# Altium PCB tempmontoring.PcbDoc
Units mil, origin at the board's own origin, x right, y up, seen from the top; angles counter-clockwise.
Board outline 1078 x 632 mil, 2 copper layers (Top Layer, Bottom Layer); 12 components, 9 nets, 44 pads, 0 vias.
Unrouted connection lines stored in the file: 26.
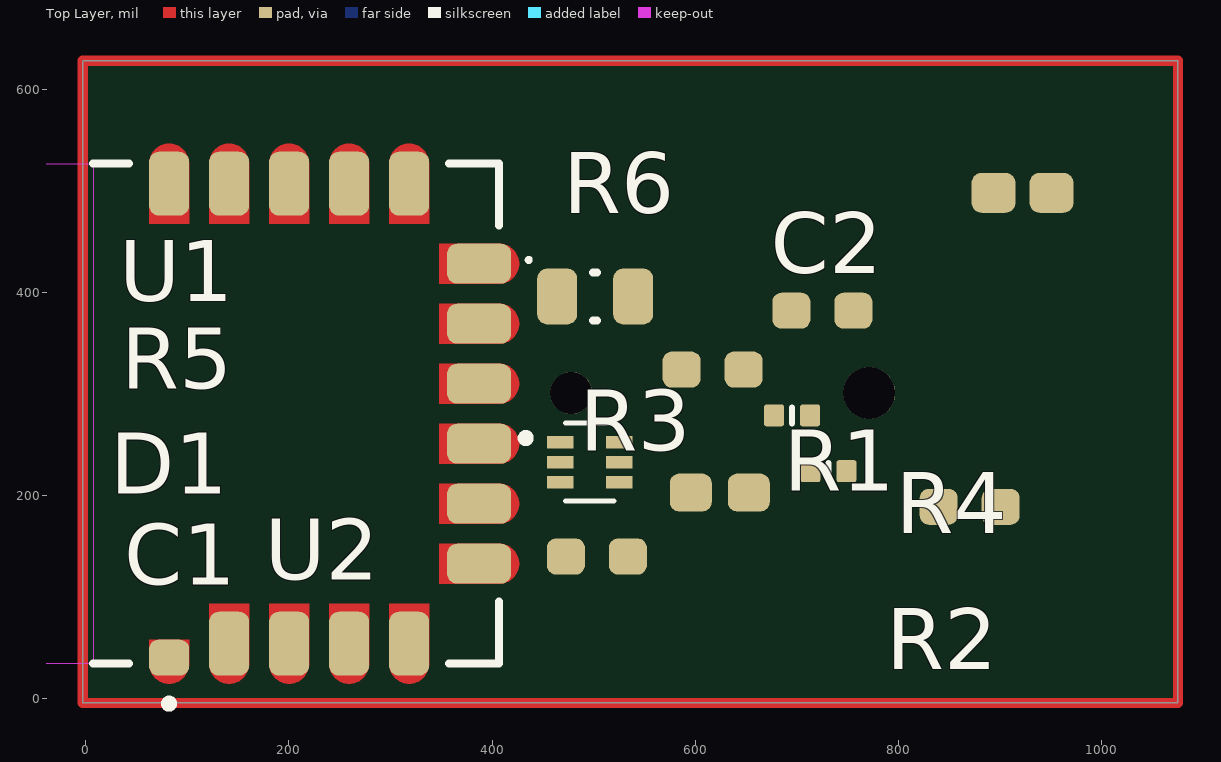
[diagram p0: Top Layer view]
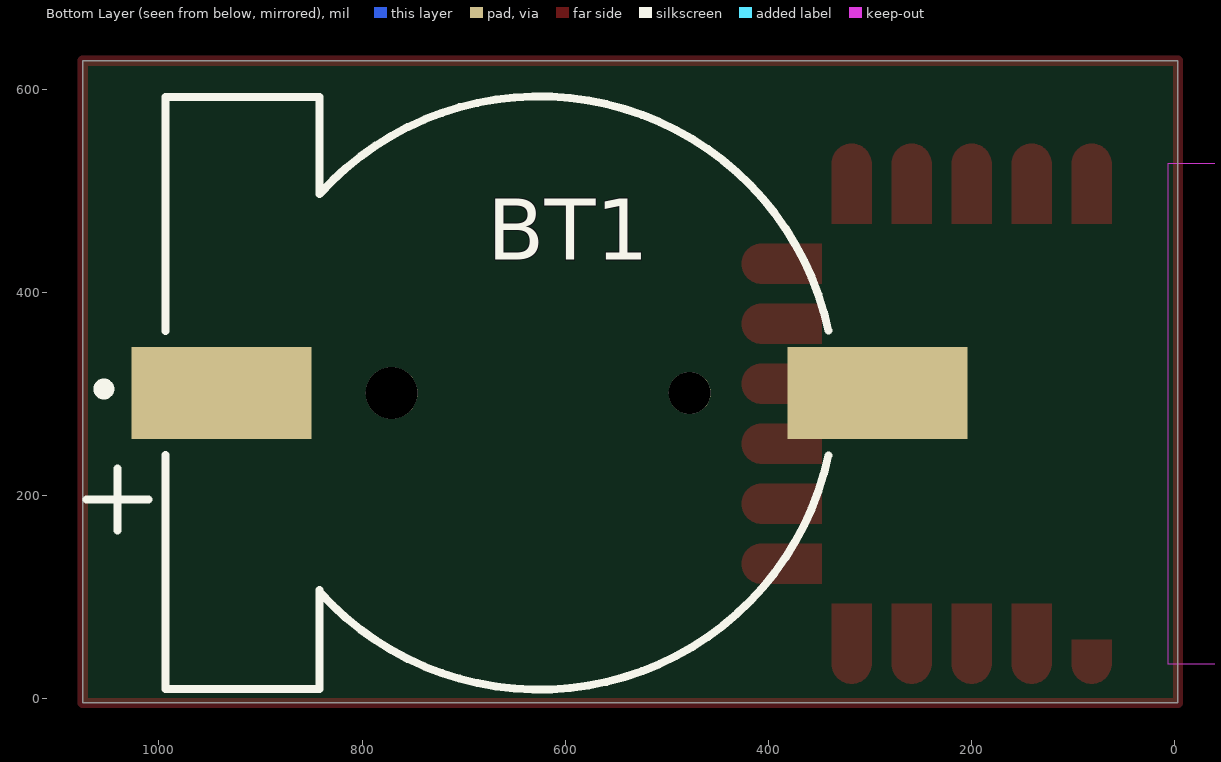
[diagram p1: Bottom Layer view, seen from below]

## Layer stack, top to bottom
Top Solder: solder mask 0.4, Solder Resist, Dk 3.5
Top Layer: signal copper 1.4
Dielectric 1: dielectric 12.6, FR-4, Dk 4.8
Bottom Layer: signal copper 1.4
Bottom Solder: solder mask 0.4, Solder Resist, Dk 3.5

## Board outline
-3,-4 -3,628 1075,628 1075,-4

## Design rules (kind name [scope] priority, off if disabled: settings)
AssemblyTestPointUsage [All] p1: isadvanced=TRUE
AssemblyTestpoint [All] p1: isadvanced=TRUE testpointundercomponent=TRUE minsize=40 maxsize=100 preferedsize=60 minholesize=0 maxholesize=40 preferedholesize=32 testpointgrid=1 usegrid=TRUE gridoriginx=-97 gridoriginy=-1572 gridtolerance=0.01 allowsidetop=TRUE allowsidebottom=TRUE
Clearance Clearance_1 [OnMid vs OnMid] p1: gap=10 ignorepadtopadclearanceinfootprint=FALSE sourcerule=38 cellrowname=All cellrowtype=0 cellcolname=All cellcoltype=0 innerlayers=TRUE
Clearance Clearance_2 [(ExistsOnLayer('Top Layer') Or ExistsOnLayer('Bottom Layer')) vs (ExistsOnLayer('Top Layer') Or ExistsOnLayer('Bottom Layer'))] p2: gap=10 ignorepadtopadclearanceinfootprint=FALSE sourcerule=38 cellrowname=All cellrowtype=0 cellcolname=All cellcoltype=0 outerlayers=TRUE
Clearance [All] p3: gap=10 ignorepadtopadclearanceinfootprint=FALSE ismatrix=TRUE
ComponentClearance [All] p1: isadvanced=TRUE gap=10 collisioncheckmode=3 verticalgap=10 showdistances=FALSE
FabricationTestPointUsage [All] p1: isadvanced=TRUE valid=0 allowmultiple=FALSE
FabricationTestpoint [All] p1: isadvanced=TRUE side=3 testpointundercomponent=TRUE minsize=40 maxsize=100 preferedsize=60 minholesize=0 maxholesize=40 preferedholesize=32 testpointgrid=1 allowsidetop=TRUE allowsidebottom=TRUE usegrid=TRUE gridoriginx=-97 gridoriginy=-1572 gridtolerance=0.01
FanoutControl Fanout_BGA [IsBGA] p1: isadvanced=TRUE bgadir=Out bgaviamode=Centered fanoutstyle=Auto fanoutdirection=Alternating viagrid=1 // Fanout_BGA (Default Rule)
FanoutControl Fanout_LCC [IsLCC] p2: isadvanced=TRUE bgadir=Out bgaviamode=Centered fanoutstyle=Auto fanoutdirection=Alternating viagrid=1 // Fanout_LCC (Default Rule)
FanoutControl Fanout_SOIC [IsSOIC] p3: isadvanced=TRUE bgadir=Out bgaviamode=Centered fanoutstyle=Auto fanoutdirection=Alternating viagrid=1 // Fanout_SOIC (Default Rule)
FanoutControl Fanout_Small [(CompPinCount < 5)] p4: isadvanced=TRUE bgadir=Out bgaviamode=Centered fanoutstyle=Auto fanoutdirection=OutThenIn viagrid=1 // Fanout_Small (Default Rule)
FanoutControl Fanout_Default [All] p5: isadvanced=TRUE bgadir=Out bgaviamode=Centered fanoutstyle=Auto fanoutdirection=Alternating viagrid=1 // Fanout_Default (Default Rule)
Height [All] p1: isadvanced=TRUE minheight=0 maxheight=1000 prefheight=500
HoleSize [All] p1: isadvanced=TRUE absolutevalues=TRUE maxlimit=100 minlimit=1 maxpercent=80.000 minpercent=20.000
HoleToHoleClearance [All] p1: isadvanced=TRUE gap=10 allowstackedmicrovias=TRUE
LayerPairs [All] p1: isadvanced=TRUE enforce=TRUE
MinimumSolderMaskSliver [All] p1: isadvanced=TRUE minsoldermaskwidth=10
NetAntennae [All] p1: isadvanced=TRUE netantennaetolerance=0
PasteMaskExpansion [All] p1: isadvanced=TRUE expansion=0
PlaneClearance [All] p1: isadvanced=TRUE clearance=20
PlaneConnect [All] p1: isadvanced=TRUE planeconnectstyle=Relief reliefexpansion=20 reliefentries=4 reliefconductorwidth=10 reliefairgap=10
PolygonConnect [All] p1: connectstyle=Relief reliefconductorwidth=10 reliefentries=4 polygonreliefangle="90 Angle" airgapwidth=10
RoutingCorners [All] p1: isadvanced=TRUE cornerstyle=45-Degree minsetback=100 maxsetback=100
RoutingPriority [All] p1: isadvanced=TRUE routingpriority=0
RoutingVias [All] p1: holewidth=28 width=50 viastyle="Through Hole" minholewidth=28 minwidth=50 maxholewidth=28 maxwidth=50
ShortCircuit [All] p1: isadvanced=TRUE allowed=FALSE
SilkToSilkClearance [All] p1: isadvanced=TRUE silktosilkclearance=10
SilkToSolderMaskClearance [IsPad] p1: isadvanced=TRUE minsilkscreentomaskgap=10 clearancetoexposedcopper=TRUE
SolderMaskExpansion [All] p1: isadvanced=TRUE expansion=4 istentingtop=FALSE
SupplyNets "Schematic Supply Nets_1" [InNet('3V3')] p1: isadvanced=TRUE voltage=0.000
SupplyNets "Schematic Supply Nets" [InNet('GND')] p2: isadvanced=TRUE voltage=0.000
UnRoutedNet [All] p1: isadvanced=TRUE
UnpouredPolygon [All] p1: isadvanced=TRUE
Width [All] p1: maxlimit=10 minlimit=10 preferedwidth=10
4 further rules are at their usual default settings.

## Classes and differential pairs
component class tempmontoring: BT1 C1 C2 D1 R2 R3 R4 R5 R6 U2

## Components (designator, comment, footprint, x,y, rotation, side; value= is the part's Value field where it differs from the comment)
BT1 "S8411-45R, CR1220 Coin Cell" HWN_S8411-45R 624.78,298.55 r0 bottom
C1 "10uF" CAPC1608X10N 922,498 r0 top
C2 "0.1uF" CAPC1608X09N 624,203 r0 top
D1 "LED, Red" DIOC2012X08N_WTE 501.4,396 r0 top
R1 "0R" RESC1608X06N 725,382 r0 top
R2 "0R" RESC1608X06N 870,189 r0 top
R3 "0R" RESC1608X06N 503,140 r0 top
R4 "Resistor 10K  +/-1 % 0402 63 mW" RESC0402(1005)_L 731,224 r0 top value=10k
R5 "Resistor 10K  +/-1 % 0402 63 mW" RESC0402(1005)_L 695.12,279 r0 top value=10k
R6 "649R" RESC1608X06N 617,324 r0 top
U1 "DA14531MOD" DLG_DA14531MOD-00F01002 234.56,280.62 r90 top
U2 "TMP102AIDRLR" SOT50P160X60-6N 496,233 r0 top

## Footprints (in the part's own frame and the unit in brackets; to place one, negate y for a bottom-side part, rotate by r counter-clockwise, add the part's x,y. Pads: shape width x height; smd on the part's side, far side on the other; paste and mask are expansions set on the pad)
CAPC1608X09N [mm] "Chip Capacitor, 2-Leads, Body 1.60x0.80mm, IPC Medium Density"
  rrect50% 1.05x0.95 smd mask+0.064: 1(-0.725,0) 2(0.725,0)
  body extent -0.85,-0.45 0.85,0.45, height 0.9
CAPC1608X10N [mm] "Chip Capacitor, 2-Leads, Body 1.60x0.80mm, Murata, IPC Medium Density"
  rrect50% 1.1x1 smd mask+0.064: 1(-0.725,0) 2(0.725,0)
  body extent -0.87,-0.48 0.87,0.48, height 0.95
DIOC2012X08N_WTE [mm] "Chip Diode, 2-Leads, Body 2.00x1.25mm, Wurth 150080xx75000, IPC Medium Density"
  rrect50% 1x1.4 smd mask+0.064: A(0.95,0) K(-0.95,0)
  silkscreen extent -1.71,-0.6 0.05,0.96, body extent -1,-0.62 1,0.63, height 0.7
DLG_DA14531MOD-00F01002 [mm] "Dialog, DA14531MOD"
  rrect50% 0.9x1 smd paste-1 mask+0: J1(-6.1,3.875)
  rrect50% 1.6x1 smd paste+0 mask+0: J2(-5.75,2.375) J3(-5.75,0.875) J4(-5.75,-0.625) J5(-5.75,-2.125)
  rrect50% 1x1.6 smd paste+0 mask+0: J6(-3.75,-3.875)
  rrect50% 1x1.6 smd paste-1 mask+0: J7(-2.25,-3.875) J8(-0.75,-3.875) J9(0.75,-3.875) J10(2.25,-3.875) J11(3.75,-3.875)
  rrect50% 1.6x1 smd paste-1 mask+0: J12(5.75,-2.125) J13(5.75,-0.625) J14(5.75,0.875) J15(5.75,2.375) J16(5.75,3.875)
  Top Layer region: -4.75,1.875 -6.25,1.875 -6.276,1.876 -6.302,1.878 -6.328,1.881 -6.354,1.886 -6.379,1.892 -6.405,1.899 -6.429,1.908 -6.453,1.918 -6.477,1.929 -6.5,1.942 -6.522,1.956 -6.544,1.97 -6.565,1.986 -6.585,2.003 -6.604,2.021 -6.622,2.04 -6.639,2.06 -6.655,2.081 -6.669,2.103 -6.683,2.125 -6.696,2.148 -6.707,2.172 -6.717,2.196 -6.726,2.22 -6.733,2.246 -6.739,2.271 -6.744,2.297 -6.747,2.323 -6.749,2.349 -6.75,2.375 -6.749,2.401 -6.747,2.427 -6.744,2.453 -6.739,2.479 -6.733,2.504 -6.726,2.53 -6.717,2.554 -6.707,2.578 -6.696,2.602 -6.683,2.625 -6.669,2.647 -6.655,2.669 -6.639,2.69 -6.622,2.71 -6.604,2.729 -6.585,2.747 -6.565,2.764 -6.544,2.78 -6.522,2.794 -6.5,2.808 -6.477,2.821 -6.453,2.832 -6.429,2.842 -6.405,2.851 -6.379,2.858 -6.354,2.864 -6.328,2.869 -6.302,2.872 -6.276,2.874 -6.25,2.875 -4.75,2.875
  Top Layer region: 6.276,4.374 6.302,4.372 6.328,4.369 6.354,4.364 6.379,4.358 6.405,4.351 6.429,4.342 6.453,4.332 6.477,4.321 6.5,4.308 6.522,4.294 6.544,4.28 6.565,4.264 6.585,4.247 6.604,4.229 6.622,4.21 6.639,4.19 6.655,4.169 6.669,4.147 6.683,4.125 6.696,4.102 6.707,4.078 6.717,4.054 6.726,4.03 6.733,4.004 6.739,3.979 6.744,3.953 6.747,3.927 6.749,3.901 6.75,3.875 6.749,3.849 6.747,3.823 6.744,3.797 6.739,3.771 6.733,3.746 6.726,3.72 6.717,3.696 6.707,3.672 6.696,3.648 6.683,3.625 6.669,3.603 6.655,3.581 6.639,3.56 6.622,3.54 6.604,3.521 6.585,3.503 6.565,3.486 6.544,3.47 6.522,3.456 6.5,3.442 6.477,3.429 6.453,3.418 6.429,3.408 6.405,3.399 6.379,3.392 6.354,3.386 6.328,3.381 6.302,3.378 6.276,3.376 6.25,3.375 4.75,3.375 4.75,4.375 6.25,4.375
  Top Layer region: 6.276,1.374 6.302,1.372 6.328,1.369 6.354,1.364 6.379,1.358 6.405,1.351 6.429,1.342 6.453,1.332 6.477,1.321 6.5,1.308 6.522,1.294 6.544,1.28 6.565,1.264 6.585,1.247 6.604,1.229 6.622,1.21 6.639,1.19 6.655,1.169 6.669,1.147 6.683,1.125 6.696,1.102 6.707,1.078 6.717,1.054 6.726,1.03 6.733,1.004 6.739,0.979 6.744,0.953 6.747,0.927 6.749,0.901 6.75,0.875 6.749,0.849 6.747,0.823 6.744,0.797 6.739,0.771 6.733,0.746 6.726,0.72 6.717,0.696 6.707,0.672 6.696,0.648 6.683,0.625 6.669,0.603 6.655,0.581 6.639,0.56 6.622,0.54 6.604,0.521 6.585,0.503 6.565,0.486 6.544,0.47 6.522,0.456 6.5,0.442 6.477,0.429 6.453,0.418 6.429,0.408 6.405,0.399 6.379,0.392 6.354,0.386 6.328,0.381 6.302,0.378 6.276,0.376 6.25,0.375 4.75,0.375 4.75,1.375 6.25,1.375
  Top Layer region: 6.276,-0.126 6.302,-0.128 6.328,-0.131 6.354,-0.136 6.379,-0.142 6.405,-0.149 6.429,-0.158 6.453,-0.168 6.477,-0.179 6.5,-0.192 6.522,-0.206 6.544,-0.22 6.565,-0.236 6.585,-0.253 6.604,-0.271 6.622,-0.29 6.639,-0.31 6.655,-0.331 6.669,-0.353 6.683,-0.375 6.696,-0.398 6.707,-0.422 6.717,-0.446 6.726,-0.47 6.733,-0.496 6.739,-0.521 6.744,-0.547 6.747,-0.573 6.749,-0.599 6.75,-0.625 6.749,-0.651 6.747,-0.677 6.744,-0.703 6.739,-0.729 6.733,-0.754 6.726,-0.78 6.717,-0.804 6.707,-0.828 6.696,-0.852 6.683,-0.875 6.669,-0.897 6.655,-0.919 6.639,-0.94 6.622,-0.96 6.604,-0.979 6.585,-0.997 6.565,-1.014 6.544,-1.03 6.522,-1.044 6.5,-1.058 6.477,-1.071 6.453,-1.082 6.429,-1.092 6.405,-1.101 6.379,-1.108 6.354,-1.114 6.328,-1.119 6.302,-1.122 6.276,-1.124 6.25,-1.125 4.75,-1.125 4.75,-0.125 6.25,-0.125
  Top Layer region: 6.276,-1.626 6.302,-1.628 6.328,-1.631 6.354,-1.636 6.379,-1.642 6.405,-1.649 6.429,-1.658 6.453,-1.668 6.477,-1.679 6.5,-1.692 6.522,-1.706 6.544,-1.72 6.565,-1.736 6.585,-1.753 6.604,-1.771 6.622,-1.79 6.639,-1.81 6.655,-1.831 6.669,-1.853 6.683,-1.875 6.696,-1.898 6.707,-1.922 6.717,-1.946 6.726,-1.97 6.733,-1.996 6.739,-2.021 6.744,-2.047 6.747,-2.073 6.749,-2.099 6.75,-2.125 6.749,-2.151 6.747,-2.177 6.744,-2.203 6.739,-2.229 6.733,-2.254 6.726,-2.28 6.717,-2.304 6.707,-2.328 6.696,-2.352 6.683,-2.375 6.669,-2.397 6.655,-2.419 6.639,-2.44 6.622,-2.46 6.604,-2.479 6.585,-2.497 6.565,-2.514 6.544,-2.53 6.522,-2.544 6.5,-2.558 6.477,-2.571 6.453,-2.582 6.429,-2.592 6.405,-2.601 6.379,-2.608 6.354,-2.614 6.328,-2.619 6.302,-2.622 6.276,-2.624 6.25,-2.625 4.75,-2.625 4.75,-1.625 6.25,-1.625
  Top Layer region: 4.25,-4.375 4.249,-4.401 4.247,-4.427 4.244,-4.453 4.239,-4.479 4.233,-4.504 4.226,-4.53 4.217,-4.554 4.207,-4.578 4.196,-4.602 4.183,-4.625 4.169,-4.647 4.155,-4.669 4.139,-4.69 4.122,-4.71 4.104,-4.729 4.085,-4.747 4.065,-4.764 4.044,-4.78 4.022,-4.794 4,-4.808 3.977,-4.821 3.953,-4.832 3.929,-4.842 3.905,-4.851 3.879,-4.858 3.854,-4.864 3.828,-4.869 3.802,-4.872 3.776,-4.874 3.75,-4.875 3.724,-4.874 3.698,-4.872 3.672,-4.869 3.646,-4.864 3.621,-4.858 3.595,-4.851 3.571,-4.842 3.547,-4.832 3.523,-4.821 3.5,-4.808 3.478,-4.794 3.456,-4.78 3.435,-4.764 3.415,-4.747 3.396,-4.729 3.378,-4.71 3.361,-4.69 3.345,-4.669 3.331,-4.647 3.317,-4.625 3.304,-4.602 3.293,-4.578 3.283,-4.554 3.274,-4.53 3.267,-4.504 3.261,-4.479 3.256,-4.453 3.253,-4.427 3.251,-4.401 3.25,-4.375 3.25,-2.875 4.25,-2.875
  Top Layer region: 2.75,-4.375 2.749,-4.401 2.747,-4.427 2.744,-4.453 2.739,-4.479 2.733,-4.504 2.726,-4.53 2.717,-4.554 2.707,-4.578 2.696,-4.602 2.683,-4.625 2.669,-4.647 2.655,-4.669 2.639,-4.69 2.622,-4.71 2.604,-4.729 2.585,-4.747 2.565,-4.764 2.544,-4.78 2.522,-4.794 2.5,-4.808 2.477,-4.821 2.453,-4.832 2.429,-4.842 2.405,-4.851 2.379,-4.858 2.354,-4.864 2.328,-4.869 2.302,-4.872 2.276,-4.874 2.25,-4.875 2.224,-4.874 2.198,-4.872 2.172,-4.869 2.146,-4.864 2.121,-4.858 2.095,-4.851 2.071,-4.842 2.047,-4.832 2.023,-4.821 2,-4.808 1.978,-4.794 1.956,-4.78 1.935,-4.764 1.915,-4.747 1.896,-4.729 1.878,-4.71 1.861,-4.69 1.845,-4.669 1.831,-4.647 1.817,-4.625 1.804,-4.602 1.793,-4.578 1.783,-4.554 1.774,-4.53 1.767,-4.504 1.761,-4.479 1.756,-4.453 1.753,-4.427 1.751,-4.401 1.75,-4.375 1.75,-2.875 2.75,-2.875
  Top Layer region: 1.25,-4.375 1.249,-4.401 1.247,-4.427 1.244,-4.453 1.239,-4.479 1.233,-4.504 1.226,-4.53 1.217,-4.554 1.207,-4.578 1.196,-4.602 1.183,-4.625 1.169,-4.647 1.155,-4.669 1.139,-4.69 1.122,-4.71 1.104,-4.729 1.085,-4.747 1.065,-4.764 1.044,-4.78 1.022,-4.794 1,-4.808 0.977,-4.821 0.953,-4.832 0.929,-4.842 0.905,-4.851 0.879,-4.858 0.854,-4.864 0.828,-4.869 0.802,-4.872 0.776,-4.874 0.75,-4.875 0.724,-4.874 0.698,-4.872 0.672,-4.869 0.646,-4.864 0.621,-4.858 0.595,-4.851 0.571,-4.842 0.547,-4.832 0.523,-4.821 0.5,-4.808 0.478,-4.794 0.456,-4.78 0.435,-4.764 0.415,-4.747 0.396,-4.729 0.378,-4.71 0.361,-4.69 0.345,-4.669 0.331,-4.647 0.317,-4.625 0.304,-4.602 0.293,-4.578 0.283,-4.554 0.274,-4.53 0.267,-4.504 0.261,-4.479 0.256,-4.453 0.253,-4.427 0.251,-4.401 0.25,-4.375 0.25,-2.875 1.25,-2.875
  Top Layer region: -0.25,-4.375 -0.251,-4.401 -0.253,-4.427 -0.256,-4.453 -0.261,-4.479 -0.267,-4.504 -0.274,-4.53 -0.283,-4.554 -0.293,-4.578 -0.304,-4.602 -0.317,-4.625 -0.331,-4.647 -0.345,-4.669 -0.361,-4.69 -0.378,-4.71 -0.396,-4.729 -0.415,-4.747 -0.435,-4.764 -0.456,-4.78 -0.478,-4.794 -0.5,-4.808 -0.523,-4.821 -0.547,-4.832 -0.571,-4.842 -0.595,-4.851 -0.621,-4.858 -0.646,-4.864 -0.672,-4.869 -0.698,-4.872 -0.724,-4.874 -0.75,-4.875 -0.776,-4.874 -0.802,-4.872 -0.828,-4.869 -0.854,-4.864 -0.879,-4.858 -0.905,-4.851 -0.929,-4.842 -0.953,-4.832 -0.977,-4.821 -1,-4.808 -1.022,-4.794 -1.044,-4.78 -1.065,-4.764 -1.085,-4.747 -1.104,-4.729 -1.122,-4.71 -1.139,-4.69 -1.155,-4.669 -1.169,-4.647 -1.183,-4.625 -1.196,-4.602 -1.207,-4.578 -1.217,-4.554 -1.226,-4.53 -1.233,-4.504 -1.239,-4.479 -1.244,-4.453 -1.247,-4.427 -1.249,-4.401 -1.25,-4.375 -1.25,-2.875 -0.25,-2.875
  Top Layer region: -1.75,-4.375 -1.751,-4.401 -1.753,-4.427 -1.756,-4.453 -1.761,-4.479 -1.767,-4.504 -1.774,-4.53 -1.783,-4.554 -1.793,-4.578 -1.804,-4.602 -1.817,-4.625 -1.831,-4.647 -1.845,-4.669 -1.861,-4.69 -1.878,-4.71 -1.896,-4.729 -1.915,-4.747 -1.935,-4.764 -1.956,-4.78 -1.978,-4.794 -2,-4.808 -2.023,-4.821 -2.047,-4.832 -2.071,-4.842 -2.095,-4.851 -2.121,-4.858 -2.146,-4.864 -2.172,-4.869 -2.198,-4.872 -2.224,-4.874 -2.25,-4.875 -2.276,-4.874 -2.302,-4.872 -2.328,-4.869 -2.354,-4.864 -2.379,-4.858 -2.405,-4.851 -2.429,-4.842 -2.453,-4.832 -2.477,-4.821 -2.5,-4.808 -2.522,-4.794 -2.544,-4.78 -2.565,-4.764 -2.585,-4.747 -2.604,-4.729 -2.622,-4.71 -2.639,-4.69 -2.655,-4.669 -2.669,-4.647 -2.683,-4.625 -2.696,-4.602 -2.707,-4.578 -2.717,-4.554 -2.726,-4.53 -2.733,-4.504 -2.739,-4.479 -2.744,-4.453 -2.747,-4.427 -2.749,-4.401 -2.75,-4.375 -2.75,-2.875 -1.75,-2.875
  Top Layer region: -3.25,-4.375 -3.251,-4.401 -3.253,-4.427 -3.256,-4.453 -3.261,-4.479 -3.267,-4.504 -3.274,-4.53 -3.283,-4.554 -3.293,-4.578 -3.304,-4.602 -3.317,-4.625 -3.331,-4.647 -3.345,-4.669 -3.361,-4.69 -3.378,-4.71 -3.396,-4.729 -3.415,-4.747 -3.435,-4.764 -3.456,-4.78 -3.478,-4.794 -3.5,-4.808 -3.523,-4.821 -3.547,-4.832 -3.571,-4.842 -3.595,-4.851 -3.621,-4.858 -3.646,-4.864 -3.672,-4.869 -3.698,-4.872 -3.724,-4.874 -3.75,-4.875 -3.776,-4.874 -3.802,-4.872 -3.828,-4.869 -3.854,-4.864 -3.879,-4.858 -3.905,-4.851 -3.929,-4.842 -3.953,-4.832 -3.977,-4.821 -4,-4.808 -4.022,-4.794 -4.044,-4.78 -4.065,-4.764 -4.085,-4.747 -4.104,-4.729 -4.122,-4.71 -4.139,-4.69 -4.155,-4.669 -4.169,-4.647 -4.183,-4.625 -4.196,-4.602 -4.207,-4.578 -4.217,-4.554 -4.226,-4.53 -4.233,-4.504 -4.239,-4.479 -4.244,-4.453 -4.247,-4.427 -4.249,-4.401 -4.25,-4.375 -4.25,-2.875 -3.25,-2.875
  Top Layer region: -4.75,-2.625 -6.25,-2.625 -6.276,-2.624 -6.302,-2.622 -6.328,-2.619 -6.354,-2.614 -6.379,-2.608 -6.405,-2.601 -6.429,-2.592 -6.453,-2.582 -6.477,-2.571 -6.5,-2.558 -6.522,-2.544 -6.544,-2.53 -6.565,-2.514 -6.585,-2.497 -6.604,-2.479 -6.622,-2.46 -6.639,-2.44 -6.655,-2.419 -6.669,-2.397 -6.683,-2.375 -6.696,-2.352 -6.707,-2.328 -6.717,-2.304 -6.726,-2.28 -6.733,-2.254 -6.739,-2.229 -6.744,-2.203 -6.747,-2.177 -6.749,-2.151 -6.75,-2.125 -6.749,-2.099 -6.747,-2.073 -6.744,-2.047 -6.739,-2.021 -6.733,-1.996 -6.726,-1.97 -6.717,-1.946 -6.707,-1.922 -6.696,-1.898 -6.683,-1.875 -6.669,-1.853 -6.655,-1.831 -6.639,-1.81 -6.622,-1.79 -6.604,-1.771 -6.585,-1.753 -6.565,-1.736 -6.544,-1.72 -6.522,-1.706 -6.5,-1.692 -6.477,-1.679 -6.453,-1.668 -6.429,-1.658 -6.405,-1.649 -6.379,-1.642 -6.354,-1.636 -6.328,-1.631 -6.302,-1.628 -6.276,-1.626 -6.25,-1.625 -4.75,-1.625
  Top Layer region: -4.75,-1.125 -6.25,-1.125 -6.276,-1.124 -6.302,-1.122 -6.328,-1.119 -6.354,-1.114 -6.379,-1.108 -6.405,-1.101 -6.429,-1.092 -6.453,-1.082 -6.477,-1.071 -6.5,-1.058 -6.522,-1.044 -6.544,-1.03 -6.565,-1.014 -6.585,-0.997 -6.604,-0.979 -6.622,-0.96 -6.639,-0.94 -6.655,-0.919 -6.669,-0.897 -6.683,-0.875 -6.696,-0.852 -6.707,-0.828 -6.717,-0.804 -6.726,-0.78 -6.733,-0.754 -6.739,-0.729 -6.744,-0.703 -6.747,-0.677 -6.749,-0.651 -6.75,-0.625 -6.749,-0.599 -6.747,-0.573 -6.744,-0.547 -6.739,-0.521 -6.733,-0.496 -6.726,-0.47 -6.717,-0.446 -6.707,-0.422 -6.696,-0.398 -6.683,-0.375 -6.669,-0.353 -6.655,-0.331 -6.639,-0.31 -6.622,-0.29 -6.604,-0.271 -6.585,-0.253 -6.565,-0.236 -6.544,-0.22 -6.522,-0.206 -6.5,-0.192 -6.477,-0.179 -6.453,-0.168 -6.429,-0.158 -6.405,-0.149 -6.379,-0.142 -6.354,-0.136 -6.328,-0.131 -6.302,-0.128 -6.276,-0.126 -6.25,-0.125 -4.75,-0.125
  Top Layer region: -4.75,0.375 -6.25,0.375 -6.276,0.376 -6.302,0.378 -6.328,0.381 -6.354,0.386 -6.379,0.392 -6.405,0.399 -6.429,0.408 -6.453,0.418 -6.477,0.429 -6.5,0.442 -6.522,0.456 -6.544,0.47 -6.565,0.486 -6.585,0.503 -6.604,0.521 -6.622,0.54 -6.639,0.56 -6.655,0.581 -6.669,0.603 -6.683,0.625 -6.696,0.648 -6.707,0.672 -6.717,0.696 -6.726,0.72 -6.733,0.746 -6.739,0.771 -6.744,0.797 -6.747,0.823 -6.749,0.849 -6.75,0.875 -6.749,0.901 -6.747,0.927 -6.744,0.953 -6.739,0.979 -6.733,1.004 -6.726,1.03 -6.717,1.054 -6.707,1.078 -6.696,1.102 -6.683,1.125 -6.669,1.147 -6.655,1.169 -6.639,1.19 -6.622,1.21 -6.604,1.229 -6.585,1.247 -6.565,1.264 -6.544,1.28 -6.522,1.294 -6.5,1.308 -6.477,1.321 -6.453,1.332 -6.429,1.342 -6.405,1.351 -6.379,1.358 -6.354,1.364 -6.328,1.369 -6.302,1.372 -6.276,1.374 -6.25,1.375 -4.75,1.375
  Top Layer region: -4.75,1.875 -6.25,1.875 -6.276,1.876 -6.302,1.878 -6.328,1.881 -6.354,1.886 -6.379,1.892 -6.405,1.899 -6.429,1.908 -6.453,1.918 -6.477,1.929 -6.5,1.942 -6.522,1.956 -6.544,1.97 -6.565,1.986 -6.585,2.003 -6.604,2.021 -6.622,2.04 -6.639,2.06 -6.655,2.081 -6.669,2.103 -6.683,2.125 -6.696,2.148 -6.707,2.172 -6.717,2.196 -6.726,2.22 -6.733,2.246 -6.739,2.271 -6.744,2.297 -6.747,2.323 -6.749,2.349 -6.75,2.375 -6.749,2.401 -6.747,2.427 -6.744,2.453 -6.739,2.479 -6.733,2.504 -6.726,2.53 -6.717,2.554 -6.707,2.578 -6.696,2.602 -6.683,2.625 -6.669,2.647 -6.655,2.669 -6.639,2.69 -6.622,2.71 -6.604,2.729 -6.585,2.747 -6.565,2.764 -6.544,2.78 -6.522,2.794 -6.5,2.808 -6.477,2.821 -6.453,2.832 -6.429,2.842 -6.405,2.851 -6.379,2.858 -6.354,2.864 -6.328,2.869 -6.302,2.872 -6.276,2.874 -6.25,2.875 -4.75,2.875
  Top Layer region: -5.65,3.375 -6.25,3.375 -6.276,3.376 -6.302,3.378 -6.328,3.381 -6.354,3.386 -6.379,3.392 -6.405,3.399 -6.429,3.408 -6.453,3.418 -6.477,3.429 -6.5,3.442 -6.522,3.456 -6.544,3.47 -6.565,3.486 -6.585,3.503 -6.604,3.521 -6.622,3.54 -6.639,3.56 -6.655,3.581 -6.669,3.603 -6.683,3.625 -6.696,3.648 -6.707,3.672 -6.717,3.696 -6.726,3.72 -6.733,3.746 -6.739,3.771 -6.744,3.797 -6.747,3.823 -6.749,3.849 -6.75,3.875 -6.749,3.901 -6.747,3.927 -6.744,3.953 -6.739,3.979 -6.733,4.004 -6.726,4.03 -6.717,4.054 -6.707,4.078 -6.696,4.102 -6.683,4.125 -6.669,4.147 -6.655,4.169 -6.639,4.19 -6.622,4.21 -6.604,4.229 -6.585,4.247 -6.565,4.264 -6.544,4.28 -6.522,4.294 -6.5,4.308 -6.477,4.321 -6.453,4.332 -6.429,4.342 -6.405,4.351 -6.379,4.358 -6.354,4.364 -6.328,4.369 -6.302,4.372 -6.276,4.374 -6.25,4.375 -5.65,4.375
  Top Layer region: 6.276,2.874 6.302,2.872 6.328,2.869 6.354,2.864 6.379,2.858 6.405,2.851 6.429,2.842 6.453,2.832 6.477,2.821 6.5,2.808 6.522,2.794 6.544,2.78 6.565,2.764 6.585,2.747 6.604,2.729 6.622,2.71 6.639,2.69 6.655,2.669 6.669,2.647 6.683,2.625 6.696,2.602 6.707,2.578 6.717,2.554 6.726,2.53 6.733,2.504 6.739,2.479 6.744,2.453 6.747,2.427 6.749,2.401 6.75,2.375 6.749,2.349 6.747,2.323 6.744,2.297 6.739,2.271 6.733,2.246 6.726,2.22 6.717,2.196 6.707,2.172 6.696,2.148 6.683,2.125 6.669,2.103 6.655,2.081 6.639,2.06 6.622,2.04 6.604,2.021 6.585,2.003 6.565,1.986 6.544,1.97 6.522,1.956 6.5,1.942 6.477,1.929 6.453,1.918 6.429,1.908 6.405,1.899 6.379,1.892 6.354,1.886 6.328,1.881 6.302,1.878 6.276,1.876 6.25,1.875 4.75,1.875 4.75,2.875 6.25,2.875
  Keep-Out Layer region: 6.25,5.775 -6.25,5.775 -6.25,10.125 6.25,10.125
  Keep-Out Layer region: 6.25,5.775 -6.25,5.775 -6.25,10.125 6.25,10.125
  Keep-Out Layer region: 6.25,5.775 -6.25,5.775 -6.25,10.125 6.25,10.125
  silkscreen extent -7.35,-4.37 6.25,5.77, body extent -6.25,-4.38 6.25,10.13, height 3.05
HWN_S8411-45R [mm] "Battery Holder, 12 mm Coin Cell, CR1220, SM"
  rect 4.5x2.3 smd: 1(7.964,-0.062) 2(-8.436,-0.062)
  round 1.05 hole 1.05 unplated: ""(-3.736,-0.062)
  round 1.3 hole 1.3 unplated: ""(3.714,-0.062)
  silkscreen extent -7.2,-7.48 11.35,7.35, body extent -9.57,-7.41 9.63,7.34, height 4.25
RESC0402(1005)_L [mm] "Chip Resistor, Body 1.0x0.5mm, IPC High Density"
  rrect25% 0.5x0.55 smd: 1(-0.45,0) 2(0.45,0)
  silkscreen extent 0,-0.2 0,0.2, body extent -0.5,-0.25 0.5,0.25, height 0.3
RESC1608X06N [mm] "Chip Resistor, 2-Leads, Body 1.60x0.80mm, IPC Medium Density"
  rrect50% 0.95x0.9 smd mask+0.064: 1(-0.775,0) 2(0.775,0)
  body extent -0.9,-0.45 0.9,0.45, height 0.55
SOT50P160X60-6N [mm]
  rect 0.66x0.31 smd: 1(-0.735,0.5) 2(-0.735,0) 3(-0.735,-0.5) 4(0.735,-0.5) 5(0.735,0) 6(0.735,0.5)
  silkscreen extent -1.7,-0.98 0.6,0.98, body extent -0.8,-0.8 0.8,0.8, height 0.6

## Part data
BT1: library part BT-S8411-45R-SR-HWN, "Battery Holder, 12 mm Coin Cell, CR1220 SM", Manufacturer=Harwin, Manufacturer's Part #=S8411-45R, Supplier Part Number 1=952-1745-1-ND, Detailed Description="Battery Holder, 12 mm Coin Cell, CR1220, SM, RoHS", Part="S8411-45R, CR1220 Coin Cell", Revision=1, Supplier 1=Digi-Key, Supplier 2=Mouser, Supplier Part Number 2=855-S8411-45R, Type="Battery Holder"
C1: library part CI-10uF-10V-X5R-SR-MRT, "Capacitor, 10uF, 10V, SM", Manufacturer=Murata, Manufacturer's Part #=GRM188R61A106KE69D, Package=0603, Supplier Part Number 1=490-10474-1-ND, Tolerance=10%, Voltage Rating=10V, Detailed Description="Capacitor, 10uF, 10V, SM 0603, Multilayer Ceramic, X5R, RoHS", Part=10uF, Revision=1, Supplier 1=Digi-Key, Supplier 2=Mouser, Supplier Part Number 2=81-GRM188R61A106KE9D, Type=Capacitor
C2: library part CI-0.1uF-50V-X7R-SR-YAG, "Capacitor, 0.1uF, 50V, SM", Manufacturer=Yageo, Manufacturer's Part #=CC0603KRX7R9BB104, Package=0603, Supplier Part Number 1=311-1344-1-ND, Tolerance=10%, Voltage Rating=50V, Detailed Description="Capacitor, 0.1uF, 50V, SM 0603, Multilayer Ceramic,, X7R, RoHS", Part=0.1uF, Revision=1, Supplier 1=Digi-Key, Supplier 2="Future Electronics", Supplier 3=Mouser, Supplier Part Number 2=9017302, Supplier Part Number 3=603-CC603KRX7R9BB104, Type=Capacitor
D1: library part DA-150080RS75000-SR-WTE, "LED, Red, 0805 SM", Manufacturer="Wurth Elektronik", Manufacturer's Part #=150080RS75000, Package=0805, Supplier Part Number 1=732-4984-1-ND, Detailed Description="LED, Red, Clear, 0805, SM, RoHS", Part="LED, Red", Revision=1, Supplier 1=Digi-Key, Supplier 2=Mouser, Supplier Part Number 2=710-150080RS75000, Type=LED
R1 R2 R3: library part RP-0-SR-KOA, "Resistor, 0 ohms, 1/8W, 1%, SM", Manufacturer="KOA Speer", Manufacturer's Part #=RK73Z1JTTD, Package=0603, Power Rating=1/8W, Resistance=0, Tolerance=1%, Voltage Rating=75V, Detailed Description="Resistor, 0 ohms, 1/8W, 1%, 100 ppm, SM, 75 WV, 100 OV, Thick Film, 0603, RoHS", Part=0R, Revision=1, Supplier 1="Arrow Electronics", Supplier 2=Digi-Key, Supplier 3=Mouser, Supplier Part Number 1=RK73Z1JTTD, Supplier Part Number 2=2019-RK73Z1JTTDCT-ND, Supplier Part Number 3=660-RK73Z1JTTD, Type=Resistor
R4 R5: library part CMP-009-00149-3, "Chip Resistor, 10 kOhms, +/-1 %, 63 mW, -55 to 125 degC, 0402", Case/Package=0402, Max Operating Temperature=155°C, Min Operating Temperature=-55°C, Power=63mW, Tolerance=1%, Pins=2
R6: library part RP-649-SR-KOA, "Resistor, 649 ohms, 1/8W, 1%, SM", Manufacturer="KOA Speer", Manufacturer's Part #=RK73H1JTTD6490F, Package=0603, Power Rating=1/8W, Resistance=649, Supplier Part Number 1=2019-RK73H1JTTD6490FCT-ND, Tolerance=1%, Voltage Rating=75V, Detailed Description="Resistor, 649 ohms, 1/8W, 1%, 100 ppm, SM, 75 WV, 100 OV, Thick Film, 0603, RoHS", Part=649R, Revision=1, Supplier 1=Digi-Key, Supplier 2=Mouser, Supplier 3="Arrow Electronics", Supplier Part Number 2=660-RK73H1JTTD6490F, Supplier Part Number 3=RK73H1JTTD6490F, Type=Resistor
U1: library part UD-DA14531MOD-00F01002-SR-DLG, "DA14531MOD, Bluetooth Low Energy 5.1 Module, SM", Manufacturer 1="Renesas Electronics", Manufacturer Part Number 1=DA14531MOD-00F01002, Package="16-SMD Module", Supplier Part Number 1=1695-DA14531MOD-00F01002CT-ND, Detailed Description="DA14531MOD, Bluetooth Low Energy 5.1 Module, 128 kB Flash, 144kB ROM, 48kB RAM, 16-SMD Module, SM, RoHS", Part=DA14531MOD, Revision=1, Supplier 1=Digi-Key, Supplier 2=Mouser, Supplier Part Number 2=724-DA14531MODF01002, Type="BLE 5.1 Module"
U2: "2C digital temperature sensor, I2C/SMBus in 2.56mm2 package", Package="SOT-5X3-6 Texas Instruments", Availability="In Stock", Check_prices=https://www.snapeda.com/parts/TMP102AIDRLR/Texas+Instruments/view-part/?ref=eda, MF="Texas Instruments", MP=TMP102AIDRLR, Price=None, Purchase-URL=https://pricing.snapeda.com/search/part/TMP102AIDRLR/?ref=eda, SnapEDA_Link=https://www.snapeda.com/parts/TMP102AIDRLR/Texas+Instruments/view-part/?ref=snap

## Nets (pads, with @x,y where several pads share a name; then routed paths per layer and width w, separated by ;. In a path a pad name is that pad's centre, name@x,y a point inside that pad or via, vN(x,y) a via of type N, cw(c..) or ccw(c..) an arc to the next point about the centre after c; other vN are vias at no path point)
3V3: C1.1 C2.1 D1.K R1.1 R4.1 R5.1 U1.J7 U2.5
GND: BT1.1 C1.2 C2.2 U1.J1 U1.J2 U1.J3 U1.J4 U1.J6 U1.J11 U2.2 U2.4
NetBT1_2: BT1.2 R1.2
NetD1_A: D1.A R6.2
NetR2_1: R2.1 R5.2 U1.J10
NetR2_2: R2.2 U2.1
NetR3_1: R3.1 R4.2 U1.J9
NetR3_2: R3.2 U2.6
NetR6_1: R6.1 U2.3
pads on no net: BT1. U1.J5 U1.J8 U1.J12 U1.J13 U1.J14 U1.J15 U1.J16
copper on no net: | length 3420
  Top Layer w10: -3,-4 1075,-4 1075,628 -3,628 -3,-4